# Altium PCB Copy of corePCB3.PcbDoc (part 2 of 3)
Units mil, origin at the board's own origin, x right, y up, seen from the top; angles counter-clockwise.
Board outline 6000 x 4000 mil, 6 copper layers (Top Layer, Layer 3, Layer 1, Layer 2, Layer 4, Bottom Layer), stack 32.111 mil thick; 90 components, 166 nets, 637 pads, 472 vias.
Unrouted connection lines stored in the file: 122.
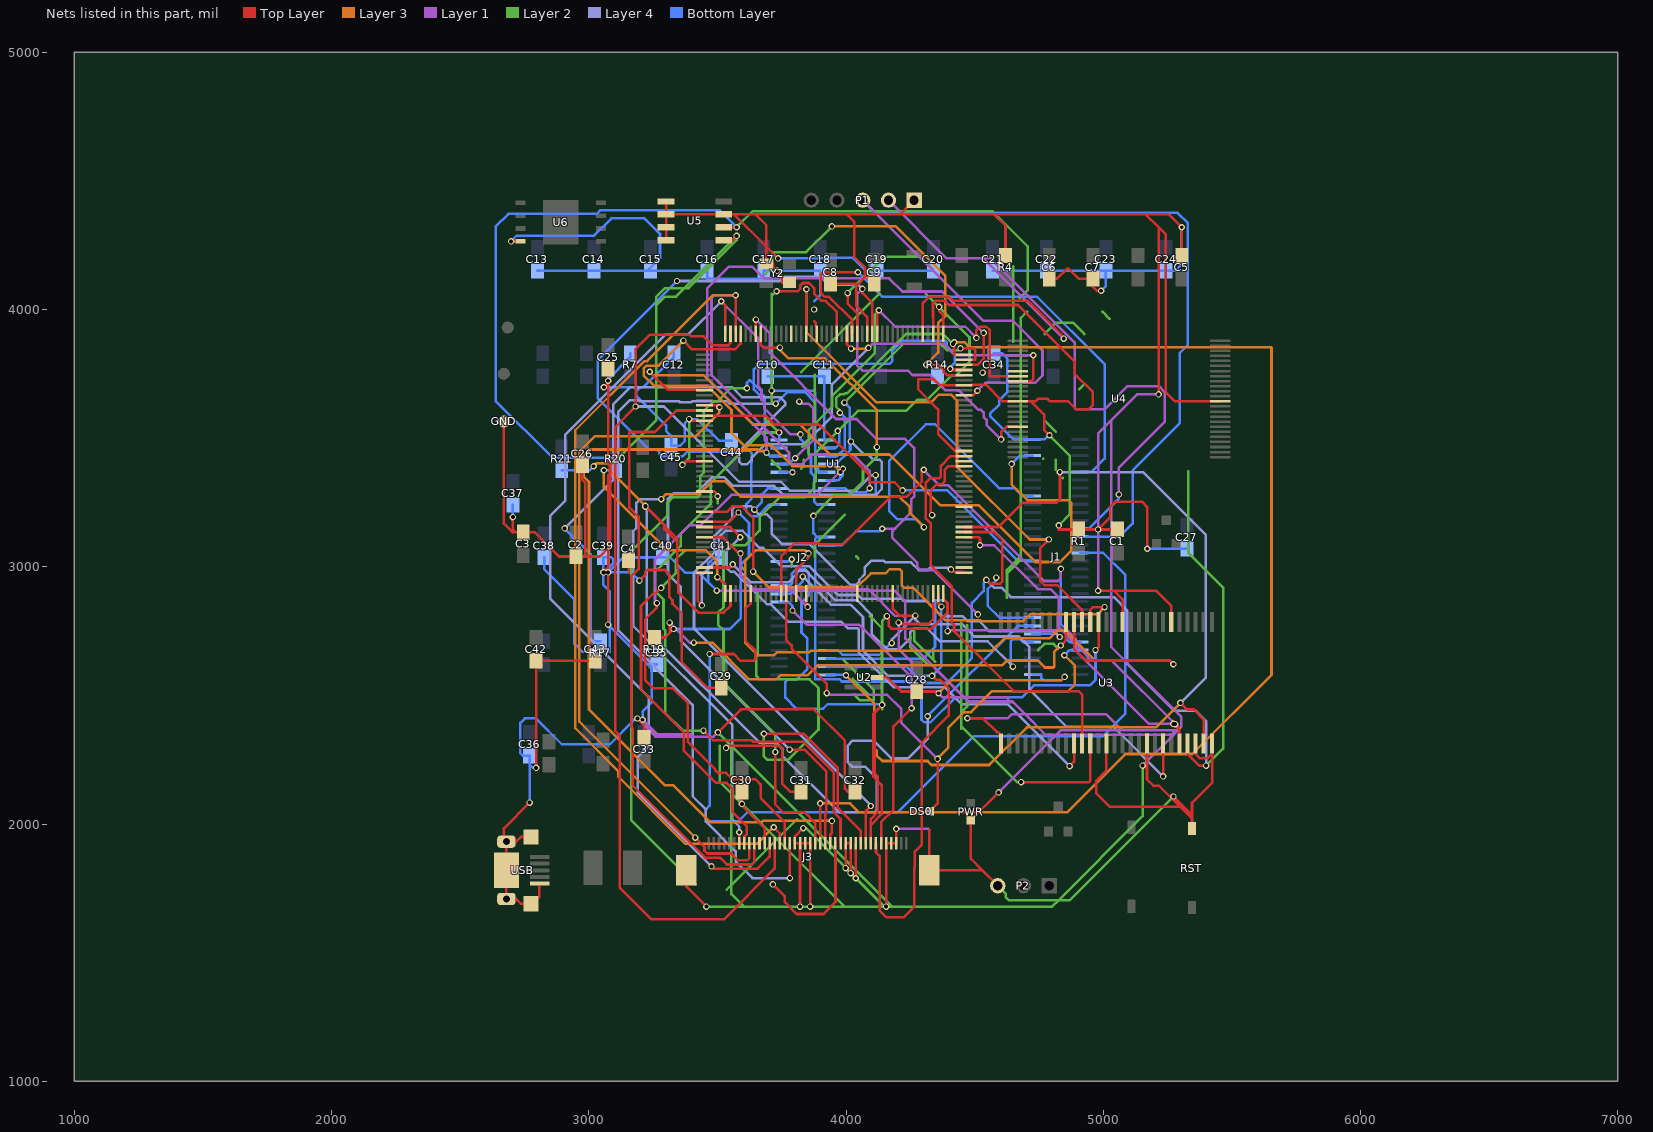
[diagram p6: the nets of this part, all layers, seen from the top]

## Via types
v1: diameter 25, hole 15, Top Layer to Bottom Layer, 472 vias

## Nets (pads, with @x,y where several pads share a name; then routed paths per layer and width w, separated by ;. In a path a pad name is that pad's centre, name@x,y a point inside that pad or via, vN(x,y) a via of type N, cw(c..) or ccw(c..) an arc to the next point about the centre after c; other vN are vias at no path point) (continued)
FMC_D12: J2.57 U1.78 U3.48 | length 2228.6
  Top Layer w10: U1.78@4180.93,2896.24 4180.93,2837.07 4208,2810 v1(4270,2810) ; v1(5232.99,2185) U3.48@5232.99,2312.56
  Layer 2 w10: 4266,2749.5 4266,2711 4338.38,2638.62 ; 4338.38,2677.12 4338.38,2638.62 ; 4346,2631 4338.38,2638.62
  Layer 4 w10: v1(4178,2703) 4178,2718 v1(4270,2810) 4270,2795 4288,2777 4450.62,2777 4498.62,2729 4672,2729 4713,2688 4713,2522 4857,2378 5039.99,2378 v1(5232.99,2185)
  Bottom Layer w10: J2.57@3925.04,2674.53 3970,2674.53 3986.53,2658 4130,2658 4175,2703 v1(4178,2703)
FMC_D13: J2.58 U1.96 U3.50 | length 3163.5
  Top Layer w10: U1.96@4459.09,3115.35 4516,3115.35 4521,3110.35 v1(4521,3083.61) ; v1(5273,2389) 5295.98,2366.02 ; v1(5279.98,2388.5) 5295.98,2372.5 5295.98,2366.02 ; U3.50@5295.98,2312.56 5295.98,2366.02
  Layer 1 w10: v1(4395,2750) 4399,2754 4839,2754 ; v1(4521,3083.61) 4575.5,3083.61 4746.37,2912.75 4795.25,2912.75 4828,2880 4828,2765 4839,2754 ; v1(5273,2389) 5178,2389 4893,2674 4893,2700 ; v1(5279.98,2388.5) 5032.98,2635.5 4952,2635.5 4941.03,2646.47 4941.03,2651.97 4893,2700 ; 4839,2754 4893,2700 ; 4839,2754 4859,2754 4893,2720 4893,2700
  Bottom Layer w10: J2.58@3925.04,2643.03 3961.47,2643.03 3962.5,2642 4300,2642 4346,2688 4346,2868 4347,2869 4384,2869 4395,2858 v1(4395,2750)
FMC_D14: J2.59 U1.97 U3.51 | length 5362.1
  Top Layer w10: U1.97@4459.09,3135.04 4576,3135.04 4608,3103.04 4608,2943 4599.5,2934.5 4560.5,2934.5 v1(4546,2949) ; U3.51@5327.48,2312.56 5327.48,2272 5372.48,2227 v1(5400,2227)
  Layer 2 w10: 4626,2879 4626,2974.56 ; 4704,3992 4680,3968 4680,3042 ; 4997,3992 5025,3964 ; 5331,3372 5331,3054 5466,2919 5466,2293 v1(5400,2227) ; 4626,2974.56 4626,2988 4680,3042 ; 4626,2974.56 4680,3028.56 4680,3042
  Layer 4 w10: v1(4546,2949) 4576,2919 4604,2919 4641,2882 5041.5,2882 5093,2830.5 5093,2624 5277,2440 5360,2440 5400,2400 v1(5400,2227)
  Bottom Layer w10: J2.59@3925.04,2611.54 4235.96,2611.54 4299.5,2548 4392.5,2548 4489,2644.5 4489,2859 4535,2905 4535,2938 v1(4546,2949)
FMC_D15: J2.60 U1.98 U3.53 | length 4148.1
  Top Layer w10: U1.98@4459.09,3154.72 4593.72,3154.72 4688,3249 4819,3249 4832,3262 4832,3367 v1(4831,3368) ; v1(5300,2471) 5326,2445 5352.47,2445 5390.47,2407 U3.53@5390.47,2312.56
  Layer 2 w10: 4772,3568 4815,3525 ; 4772,3904 4817,3949 4882,3949 4927,3904 ; 4815,3378 4815,3415.1 ; 4907.5,3690.5 4927,3710
  Layer 3 w10: v1(4000,2578) 4110,2468 4110,2294 4119,2285 4119,2267 4141,2245 4317,2245 4332.5,2229.5 4556.5,2229.5 4703,2376 5205,2376 v1(5300,2471)
  Layer 4 w10: v1(4831,3368) 5154,3368 5399,3123 5399,2570 v1(5300,2471)
  Bottom Layer w10: J2.60@3925.04,2580.04 3997.96,2580.04 v1(4000,2578)
FMC_NBL0: J2.43 U1.169 U3.15 | length 3349.1
  Top Layer w10: U1.169@3669.11,3905.33 3669.11,3862.89 3680,3852 v1(3743,3852) ; v1(4970,2676) 4982,2688 4982,2753.02 4981.02,2754 U3.15@4981.02,2785
  Layer 2 w10: v1(3873,3198) 3952.06,3277.06 4011.06,3277.06 4066,3332 4066,3375 4120,3429 v1(4120,3465)
  Layer 3 w10: v1(3743,3852) 3743,3843 3776,3810 3919,3810 4120,3609 v1(4120,3465)
  Bottom Layer w10: v1(3873,3198) 3873,3130.47 3888,3115.47 ; J2.43@3925.04,3115.47 3888,3115.47 ; v1(4970,2676) 4970,2560 4949,2539 4730,2539 4683.5,2492.5 4425,2492.5 4328,2395.5 4304,2395.5 4293.5,2406 4293.5,2505 4244.5,2554 3984,2554 3975,2563 3880,2563 3880,3107.47 3888,3115.47
FMC_NBL1: J2.44 U1.170 U3.39 | length 3616
  Top Layer w10: U1.170@3649.43,3905.33 v1(3649.43,3961) ; v1(4681,2163) 4944,2163 4949.53,2168.53 U3.39@4949.53,2312.56
  Layer 1 w10: v1(3649.43,3961) 3704,3906.43 3704,3832.44 3961.87,3574.57 4041.43,3574.57 4118.5,3497.5 4230,3497.5 4265,3462.5 4265,3272.5 4253.5,3261 4253.5,3210.5 4190.98,3147.98 ; v1(4140.98,3147.98) 4190.98,3147.98 ; v1(4513,2815) 4340.5,2987.5 4288,2987.5 4277.13,2998.37 4277.13,3014.87 4180,3112 4180,3137 4190.98,3147.98
  Layer 2 w10: 4448,2371 4448,2783 ; 4470.5,2772.5 4470.5,2456.5 4448.5,2434.5 4448.5,2379.5 4665,2163 v1(4681,2163)
  Bottom Layer w10: J2.44@3925.04,3083.98 3984,3083.98 4038.02,3138 4131,3138 v1(4140.98,3147.98)
FMC_NCE3: R17.2 U1.152 U4.9 | length 3824
  Top Layer w10: U1.152@4003.76,3905.33 4003.76,3864.24 v1(4020,3848) ; U4.9@4667.6,3721.53 4720,3721.53 4728,3729.53 v1(4728,3822)
  Layer 1 w10: v1(4087,3851) 4102.5,3866.5 4381,3866.5 4425.5,3822 v1(4728,3822)
  Layer 3 w10: v1(4020,3848) 4084,3848 v1(4087,3851)
  Layer 4 w10: v1(2906,3149) 3094.5,3337.5 3094.5,3630.5 3162,3698 3556,3698 3595,3659 3744,3659 3763.06,3639.94 3763.06,3628.08 3585.13,3450.15 3585.13,3408 3594.63,3398.5 3616,3398.5 3633.5,3416 3633.5,3422.5 3687.5,3476.5 3837.5,3476.5 3945,3584 3945,3709 v1(4087,3851)
  Bottom Layer w10: v1(2906,3149) 3008,3047 3008,2718 3016,2710 R17.2@3045.06,2710
FMC_NE1: J1.35 U1.151 | length 2030.1
  Top Layer w10: U1.151@4023.44,3905.33 4023.44,3960.49 3934.43,4049.5 3916.52,4049.5 3902.18,4063.84 3902.18,4136 3911.18,4145 v1(4046,4145)
  Bottom Layer w10: v1(4046,4145) 4141.5,4049.5 4743.5,4049.5 5005.25,3787.75 5005.25,3420.27 4954,3369.02 J1.35@4910,3369.02
FMC_NOE: J2.26 U1.146 U4.8 | length 1928.8
  Top Layer w10: U1.146@4121.87,3905.33 4121.87,3991 v1(4127.87,3997) ; v1(4507,3890) 4507,3920 4520,3933 4546,3933 4559,3920 4559,3741.22 U4.8@4667.6,3741.22
  Layer 1 w10: v1(4127.87,3997) 4191.87,3933 4464,3933 v1(4507,3890)
  Layer 2 w10: 3830,3466 3856,3492 ; 3856,3431.44 3856,3492 ; 3878,3747 3878,3554 ; v1(4127.87,3997) 4112.43,3981.56 4112.43,3830.5 3946.01,3664.08 3946.01,3622.01 3878,3554 ; 3856,3492 3856,3532 3878,3554 ; 3856,3492 3878,3514 3878,3554
  Bottom Layer w10: J2.26@3740,3367.44 v1(3792,3367.44)
FMC_NWAIT: J2.27 U1.150 U4.7 | length 1243.2
  Top Layer w10: v1(4006,4064) 4006,4023.13 4043.13,3986 U1.150@4043.13,3905.33 ; v1(4531,3755) v1@4536.9,3760.9
  Layer 1 w10: v1(3802,3422) 3873,3493 3873,3616 3856,3633 3827,3633 v1(3818,3642)
  Layer 2 w10: v1(4006,4064) 4147,4205 4290,4205 4335,4160 ; 4650,3874 4650,4168
  Bottom Layer w10: J2.27@3740,3398.94 3778.94,3398.94 v1(3802,3422)
FMC_NWE: J2.22 U1.147 U4.18 | length 3726.5
  Top Layer w10: v1(4064,4080) 4064,4064 4102.19,4025.81 U1.147@4102.19,3905.33 ; v1(4603,3495) 4603,3523.37 4624,3544.37 U4.18@4667.6,3544.37
  Layer 1 w10: v1(4064,4080) 4043.5,4059.5 4043.5,3783.09 4064,3762.59 4240.41,3762.59 4257.5,3745.5 4326.58,3745.5 4386.58,3685.5 4440.11,3685.5 4515.85,3609.75 4525.25,3609.75 4535,3600 4535,3582.5 4546.62,3570.88 4546.62,3551.38 v1(4603,3495)
  Layer 4 w10: v1(3343,4111) 3743,4111 3760,4128 3900,4128 3932,4096 4048,4096 v1(4064,4080)
  Bottom Layer w10: v1(3343,4111) 3035.5,3803.5 3035.5,3654.5 3234.18,3455.82 3264,3455.82 3274.5,3445.32 3274.5,3440 3285.5,3429 3365,3429 3384,3448 3591,3448 3594,3451 3624,3451 3634,3441 3634,3406.5 3631.5,3404 3631.5,3262.5 3613,3244 3613,3215 3632,3196 3655,3196 3700.46,3241.46 J2.22@3740,3241.46
FMC_SDCKE0: U1.35 U3.37 | length 2096
  Top Layer w10: U1.35@3450,3154.72 3549.28,3154.72 v1(3589,3115) ; v1(4869,2225) 4886.53,2242.53 U3.37@4886.53,2312.56
  Layer 4 w10: v1(3589,3115) 3536,3062 3536,2996 3552,2980 3566.37,2980 3691.95,2854.43 3707.12,2854.43 3774.55,2787 3980.5,2787 4007,2760.5 4046,2760.5 4049.27,2757.23 4049.27,2667.73 4185,2532 4383,2532 4449,2466 4628,2466 v1(4869,2225)
FMC_SDCLK: U1.112 U3.38 | length 1629.9
  Top Layer w10: U1.112@4459.09,3430.32 4406.86,3430.32 4368.54,3392 4368.54,3350.17 4362.37,3344 4326.51,3344 4310.51,3328 4310.51,3186.99 4320,3177.5 4320.28,3177.5 4329.78,3168 4329.78,3005.72 4410.5,2925 4410.5,2782.67 4419.87,2773.3 4419.87,2749.8 4653.67,2516 4905,2516 4918.03,2502.97 U3.38@4918.03,2312.56
FMC_SDNCAS: U1.160 U3.17 | length 2224.6
  Top Layer w10: U1.160@3846.28,3905.33 v1(3846.28,4079) ; v1(4789,3106) 4755.5,3072.5 4755.5,2944 4770.75,2928.75 4821.25,2928.75 4918.03,2831.97 U3.17@4918.03,2785
  Layer 3 w10: v1(3846.28,4079) 3846.28,3911.72 4118.78,3639.22 4330.22,3639.22 4360.5,3669.5 4407.5,3669.5 4431.61,3645.39 4431.61,3388.69 4714.31,3106 v1(4789,3106)
FMC_SDNE0: R19.2 U1.34 U3.19 | length 2936.8
  Top Layer w10: R19.2@3255.06,2725 3296,2725 ; v1(3314,2783) 3314,2743 3296,2725 ; v1(3330,2758) 3297,2725 3296,2725 ; U1.34@3450,3174.41 3545.41,3174.41 v1(3582,3211) ; v1(4835.08,2694) 4855.04,2713.96 U3.19@4855.04,2785
  Layer 1 w10: v1(3314,2783) 3392,2705 v1(3408,2705)
  Layer 2 w10: 4747,2675.94 4771.03,2699.97 4807.04,2699.97 4822.66,2684.35 4822.66,2682.04
  Layer 3 w10: v1(3408,2705) 3480.19,2705 3622.69,2562.5 3730.5,2562.5 3746.5,2578.5 3851.5,2578.5 3890.5,2617.5 4607.5,2617.5 4625.5,2635.5 4745.9,2635.5 4772.9,2608.5 4806.5,2608.5 4809,2611 4809,2667.92 v1(4835.08,2694)
  Bottom Layer w10: v1(3330,2758) 3548.5,2758 3591,2800.5 3591,3008 3623,3040 3623,3170 v1(3582,3211)
FMC_SDNRAS: U1.59 U3.18 | length 3356.9
  Top Layer w10: U1.59@3806.91,2896.24 3806.91,2988.91 3854,3036 v1(3854,3052) ; U3.18@4886.53,2785 4886.53,2680.47 4931.5,2635.5 5258.5,2635.5 v1(5273,2621)
  Layer 2 w10: 3991,2638 4108.5,2520.5 4108.5,2482 4107.5,2481 4055,2481 4032,2504 ; 4040,3040 4048,3032
  Layer 3 w10: v1(3854,3052) 3841,3065 3650,3065 3609,3024 3609,2704 3656.5,2656.5 3720.5,2656.5 3731.5,2667.5 3857,2667.5 3863.5,2674 4568,2674 4616,2722 4791,2722 4819.5,2750.5 4853,2750.5 4968,2635.5 5258.5,2635.5 v1(5273,2621)
FMC_SDNWE: U1.32 U3.16 | length 2090.6
  Top Layer w10: U1.32@3450,3213.78 3537.78,3213.78 3558.5,3234.5 3595,3234.5 3639,3190.5 v1(3639,2981) ; U3.16@4949.53,2785 4949.53,2832.53 4960,2843 v1(5005,2843)
  Layer 3 w10: v1(3639,2981) 3699,2921 4043,2921 4096.5,2974.5 4153.91,2974.5 4170.03,2990.62 4208,2990.62 4217.03,2981.59 4217.03,2927.05 4225.43,2918.65 4260.21,2918.65 4387.36,2791.5 4522.5,2791.5 4525.52,2788.48 4688.88,2788.48 4715.52,2815.12 4977.12,2815.12 v1(5005,2843)
GBC_KEY: J1.15 U1.13 | length 1522.9
  Top Layer w10: U1.13@3450,3587.8 3687.5,3587.8 3722.3,3553 3895.06,3553 4091.5,3356.56 4091.5,3333 4096,3328.5 4188.5,3328.5 v1(4220,3297)
  Bottom Layer w10: v1(4220,3297) 4394,3297 4668.44,3022.56 J1.15@4724.96,3022.56
GBC_LED: J1.45 U1.50 | length 3677.3
  Top Layer w10: v1(3469.5,2661) 3564,2661 3590.56,2634.44 3640.51,2634.44 3648,2641.93 3648,2673.93 3609.93,2712 3609.93,2837.17 3629.74,2856.99 U1.50@3629.74,2896.24
  Bottom Layer w10: v1(3469.5,2661) 3469.5,2071.22 3455.05,2056.77 3455.05,2018.72 3464,2009.77 3580.84,2009.77 3616.06,2045 4201,2045 4496.5,2340.5 4639.13,2340.5 4639.63,2341 4998.07,2341 5085,2427.93 5085,2969.06 5000,3054.06 J1.45@4910,3054.06
GND: C1.2 C2.1 C3.2 C4.1 C5.2 C6.1 C7.1 C8.1 C9.1 C10.1 C11.1 C12.2 C13.1 C14.1 C15.1 C16.1 C17.1 C18.1 C19.1 C20.1 C21.1 C22.1 C23.1 C24.1 C25.1 C26.1 C27.1 C28.1 C29.1 C30.1 C31.1 C32.1 C33.2 C34.2 C35.1 C36.1 C37.1 C38.1 C39.1 C40.1 C41.1 C42.1 C43.1 C44.2 C45.2 GND.1 J1.1 J1.30 J2.31 J3.3 J3.4 J3.5 J3.11 J3.12 J3.13 J3.20 J3.21 J3.22 J3.23 J3.29 J3.A J3.B P1.1 P2.3 PWR.2 R1.2 R4.2 R7.2 R14.1 RST.2 U1.14 U1.22 U1.37 U1.61 U1.71 U1.90 U1.102 U1.113 U1.126 U1.135 U1.148 U1.158 U2.2 U3.6 U3.12 U3.28 U3.41 U3.46 U3.52 U3.54 U4.13 U4.36 U5.1 U5.2 U5.3 U5.4 U5.7 U6.4 USB.5 USB.6 USB.7 USB.8 USB.9 Y2.2 Y2.4 | length 45869.3
  Top Layer w10: GND.1@2670,3565 2670,3168 2703,3135 2714,3135 ; USB.7@2679.65,1708.78 USB.7@2680,1708.78 ; v1(2698,4265) U6.4@2735,4265 ; v1(2705,3193) 2705,3144 2714,3135 ; v1(2770.06,2083.06) 2670,1983 2670,1931.22 USB.6@2679.65,1931.22 USB.6@2680,1931.22 ; USB.9@2775,1950 2735.78,1950 2717,1931.22 USB.6@2680,1931.22 ; v1(2795.06,2218) C42.1@2795.06,2635 C43.1@3025.06,2635 ; USB.5@2809,1768.82 2807,1768.82 2807,1716 2775,1716 USB.8@2775,1690 2735.78,1690 2717,1708.78 USB.7@2680,1708.78 ; C26.1@2975.06,3395 2975.06,3337.94 2987,3326 2987,3048 2979,3040 ; v1(3056.38,2978) 3075,2996.62 ; v1(3059,2978) 3075,2994 ; v1(3059,3698) v1@3075,3714 ; v1(3075,2775) v1(3075,2978) 3075,2994 ; C25.1@3075,3770 v1(3075,3723) v1@3075,3714 ; 3155.06,2978.06 C4.1@3155.06,3025 ; v1(3189,2410) 3215,2384 C33.2@3215,2335 ; v1(3197,2946) 3218.84,2967.84 3218.84,2977 3229.34,2987.5 3296,2987.5 3313,2970.5 3313,2882.02 3325.42,2869.59 3325.42,2856.37 3361.5,2820.29 3361.5,2629.13 3460.63,2530 C29.1@3515,2530 ; U5.4@3300.59,4270 U5.3@3300.59,4320 U5.2@3300.59,4370 ; U5.1@3300.59,4420 U5.2@3300.59,4370 ; v1(3364,3396) 3378.63,3410.63 U1.22@3450,3410.63 ; J3.B@3379.35,1820.57 3379.35,1757 v1(3457.35,1679) ; v1(3390,3574) 3395.89,3568.11 U1.14@3450,3568.11 ; U1.37@3450,3115.35 3520.14,3115.35 3583.49,3052 v1(3590,3052) ; v1(3502,2356) 3591.5,2445.5 3874.57,2445.5 3995.57,2324.5 3995.57,2137.43 4008,2125 C32.1@4035.06,2125 ; v1(3534,2296) 3541.5,2303.5 3744,2303.5 3752,2295.5 3752,2157.79 3784.79,2125 C31.1@3825.06,2125 ; C30.1@3595.06,2125 v1(3595.06,2078.06) 3595.06,2072.4 3683.46,1984 J3.29@3683.46,1925 ; v1(3736,4199) 3690,4245 ; Y2.2@3780.55,4105 3752,4105 3752,4131 v1(3733,4150) 3717.17,4165.83 3717.17,4177.83 Y2.4@3690,4177.83 3690,4245 ; v1(3821.26,1679) J3.22@3821.26,1925 ; v1(3833.57,1984) 3801.57,1952 J3.23@3801.57,1925 J3.22@3821.26,1925 ; U1.61@3846.28,2896.24 3846.28,2848.72 v1(3851,2844) ; v1(3860.63,1679) J3.20@3860.63,1925 J3.21@3840.94,1925 J3.22@3821.26,1925 ; 3876,3955 3882,3949 3882,3936.65 3885.65,3933 U1.158@3885.65,3905.33 ; C8.1@3940.06,4100 4047.74,4100 ; v1(3998.43,1828.57) J3.13@3998.43,1925 J3.12@4018.11,1925 v1(4018.11,1808.89) ; v1(4037.8,1789.2) J3.11@4037.8,1925 ; U1.148@4082.5,3905.33 4082.5,3970.86 4040,4013.36 4040,4092.26 4047.74,4100 ; C9.1@4110.06,4100 4110.06,4103.5 4074,4139.56 ; U2.2@4120,2570 4160,2570 4215,2515 C28.1@4275,2515 4353,2515 v1(4359.5,2508.5) ; v1(4155.91,1679) J3.5@4155.91,1925 J3.4@4175.59,1925 J3.3@4195.28,1925 v1(4195.28,1981.23) ; P1.1@4265,4425 4210,4370 ; J3.A@4323.23,1820.57 J3.A@4323.23,1821 ; 4323.23,1977 J3.A@4323.23,1821 ; U1.135@4338.41,3905.33 4338.41,3970.5 4338.28,3970.63 4338.28,4024 4347.78,4033.5 4385.28,4033.5 4401.28,4017.5 4668.48,4017.5 4888.87,3797.11 4888.87,3750.13 4960,3679 4960,3629 4944,3613 4893.86,3613 4864.06,3642.79 4793.5,3642.79 4783.79,3652.5 4746.5,3652.5 4736.79,3642.79 4720,3642.79 ; U1.113@4459.09,3450 4424,3450 4358.5,3515.5 4358.5,3612.04 4280.5,3690.04 4280.5,3728 4281.31,3728.81 4340.06,3728.81 4362.97,3705.91 U1.126@4459.09,3705.91 4487,3705.91 4487,3708 4544,3708 4609.21,3642.79 U4.13@4667.6,3642.79 4720,3642.79 ; v1(4472,2411) 4533.13,2411 4587.04,2357.1 4591.13,2357.1 4603.07,2345.16 U3.28@4603.07,2312.56 ; P2.3@4590,1760 4529,1821 ; v1(4593,2123) PWR.2@4485,2015 4485,1865 4529,1821 ; R4.2@4620.06,4210 4620.06,4325.94 4576,4370 ; C6.1@4790.06,4120 4821,4120 4859,4158 4866,4158 4904,4120 C7.1@4960.06,4120 4960.06,4088 4975.06,4073 v1(4992,4073) ; v1(4791,3511) 4770,3532 4770,3592.79 4720,3642.79 ; v1(4827,3161) 4827,3145 R1.2@4905.06,3145 v1(4980,3145) ; v1(4980,2907) 5041.45,2907 ; U3.41@5012.52,2312.56 5012.52,2207.52 4972.5,2167.5 4972.5,2120.5 5026.5,2066.5 5299.5,2066.5 ; C1.2@5055.06,3145 v1(4980,3145) ; U3.12@5075.51,2785 5075.51,2872.94 5041.45,2907 ; U3.46@5170,2312.56 5170,2173.69 5194.96,2148.73 5217.27,2148.73 5299.5,2066.5 ; v1(5171,3070) 5171,3233 5152,3252 5046.63,3252 5026.63,3232 5026.63,3191.63 v1(4980,3145) ; v1(5215,3670) 5215,4320 ; U3.6@5264.49,2785 5264.49,2848 5205.49,2907 5041.45,2907 ; v1(5273,2107) 5313.5,2066.5 ; v1(5305,4320) 5305.06,4320 C5.2@5305.06,4210 ; v1(5305,4320) 5255.06,4370 5165,4370 ; RST.2@5345,1982.09 5345,2021 ; U3.52@5358.98,2312.56 5358.98,2272 5374.98,2256 5405.97,2256 5422.47,2272.5 ; U3.54@5421.97,2312.56 5421.97,2273 5422.47,2272.5 ; U4.36@5455,3642.79 5279.41,3642.79 5242.21,3680 5242.21,4292.79 5215,4320 ; USB.7@2680,1708.78 USB.9@2680,1820 USB.6@2680,1931.22 ; 2714,3135 C3.2@2745.06,3135 2789,3135 2884,3040 C2.1@2950.06,3040 2979,3040 ; 2979,3040 3043,3040 3075,3072 ; 3075,2994 3075,2996.62 ; 3075,2996.62 3075,3072 ; 3075,3072 3082.65,3079.65 3082.65,3354.78 ; 3075,3072 3075,3347.13 ; 3075,3347.13 3075,3354.78 3082.65,3362.43 ; 3075,3347.13 3082.65,3354.78 ; 3075,3401.78 3075,3400.65 3082.65,3393 ; 3075,3401.78 3075,3409.43 ; 3075,3401.78 3082.65,3394.13 ; 3075,3409.43 3075,3698 v1@3075,3714 ; 3075,3409.43 3082.65,3401.78 3082.65,3394.13 ; 3082.65,3354.78 3082.65,3362.43 ; 3082.65,3362.43 3082.65,3393 ; 3082.65,3393 3082.65,3394.13 ; U5.2@3300.59,4370 U5.7@3525,4370 3565,4370 ; 3565,4370 3690,4245 ; 3565,4370 3648,4370 ; 3648,4370 4004,4370 ; 3648,4370 3690,4328 3690,4245 ; 4004,4370 4210,4370 ; 4004,4370 4032,4342 4032,4205 4074,4163 4074,4139.56 ; 4047.74,4100 4074,4126.26 4074,4139.56 ; 4210,4370 4576,4370 ; J3.A@4323.23,1821 4529,1821 ; 4576,4370 5165,4370 ; 5165,4370 5215,4320 ; 5299.5,2066.5 5306.5,2059.5 ; 5299.5,2066.5 5313.5,2066.5 ; 5306.5,2059.5 5345,2021 ; 5306.5,2059.5 5313.5,2066.5 ; 5313.5,2066.5 5345,2035 ; 5345,2021 5345,2035 ; 5345,2035 5345,2082 5424,2161 5424,2270.97 5422.47,2272.5
  Layer 1 w10: v1(3189,2410) 3259.5,2339.5 3275.5,2339.5 ; v1(3497.5,2907.5) 3787.5,2907.5 ; v1(3502,2356) 3485.5,2339.5 3406.5,2339.5 ; v1(3590,3052) 3590,2965 3642,2913 4087.46,2913 4092.96,2907.5 ; v1(3851,2844) 3787.5,2907.5 ; v1(4195.28,1981.23) 4319,1981.23 4323.23,1977 ; v1(4359.5,2508.5) 4375.5,2492.5 4458.42,2492.5 ; v1(4472,2411) 4628.57,2411 4644.57,2427 4696,2427 ; v1(4593,2123) 4816.5,2346.5 ; v1(4980,2907) v1(4980,3145) 4980,3518 5031,3569 ; v1(5153,2227) 5272.5,2346.5 ; v1(5215,3670) 5132,3670 5031,3569 ; 3267,2348 3398,2348 3406.5,2339.5 ; 3267,2348 3261.5,2348 3209.5,2400 v1(3209.5,2405.5) 3267,2348 ; 3267,2348 3275.5,2339.5 ; 3275.5,2339.5 3406.5,2339.5 ; 3787.5,2907.5 4092.96,2907.5 ; 4092.96,2907.5 4190.96,2809.5 4221,2809.5 4230.5,2800 ; 4092.96,2907.5 4188.68,2907.5 4230.5,2865.68 4230.5,2800 ; 4230.5,2721.99 4230.5,2720.42 4458.42,2492.5 ; 4230.5,2721.99 4459.99,2492.5 ; 4230.5,2721.99 4230.5,2800 ; 4458.42,2492.5 4477.42,2473.5 4630.5,2473.5 ; 4458.42,2492.5 4459.99,2492.5 ; 4459.99,2492.5 4475.8,2476.7 4630.5,2476.7 ; 4459.99,2492.5 4630.5,2492.5 4630.5,2476.7 ; 4630.5,2473.5 4630.5,2476.7 ; 4630.5,2473.5 4649.5,2473.5 ; 4630.5,2476.7 4646.3,2476.7 4649.5,2473.5 ; 4649.5,2473.5 4696,2427 ; 4696,2427 5011.15,2427 5073.15,2365 ; 4696,2427 4776.5,2346.5 4816.5,2346.5 ; 4816.5,2346.5 5272.5,2346.5 ; 4816.5,2346.5 4835,2365 5073.15,2365 ; 5031,3569 5031,2689 5304,2416 5304,2378 5291,2365 ; 5073.15,2365 5272.5,2365 ; 5272.5,2346.5 5291,2365 ; 5272.5,2346.5 5272.5,2365 ; 5272.5,2365 5291,2365
  Layer 2 w10: v1(3364,3396) 3390,3422 v1(3390,3574) ; v1(3457.35,1679) 3603,1679 ; v1(3502,2356) 3510,2348 3554,2304 ; 3510,2304 3510,2163 3554,2119 ; 3536,1744.35 3554,1762.35 ; v1@3595,2078 3554,2119 ; v1(3595.06,2078.06) 3732.39,1940.74 ; 3810.14,2018.49 3732.39,1940.74 ; v1(3833.57,1984) 3844.63,1984 v1@4149.63,1679 ; v1(3998.43,1828.57) v1(4018.11,1808.89) v1(4037.8,1789.2) v1@4148,1679 ; P2.3@4590,1760 4620.61,1729.39 4620.61,1716.34 4633.47,1703.47 4825.47,1703.47 ; v1(4791,3511) 4870.5,3431.5 4870.5,3204.5 v1(4827,3161) ; 4843,3344 4843,3346 ; v1(5153,2227) 5153,2210 5153,2031 4825.47,1703.47 ; v1(5273,2107) 4869.47,1703.47 4825.47,1703.47 ; 3554,1762.35 3732.39,1940.74 ; 3554,1762.35 3554,2119 ; 3554,1762.35 3554,1728 3603,1679 ; 3554,2119 3554,2304 ; 3554,2304 4167.45,1690.55 4179,1679 ; 3603,1679 v1(3821.26,1679) v1(3860.63,1679) 3994.13,1679 ; 3732.39,1940.74 3994.13,1679 ; 3994.13,1679 v1@4148,1679 ; v1@4148,1679 v1@4149.63,1679 ; v1@4149.63,1679 4151,1679 v1(4155.91,1679) 4179,1679 ; 4179,1679 4801,1679 4825.47,1703.47
  Layer 3 w10: v1(4359.5,2508.5) 4409.9,2558.9 4836.9,2558.9 v1(4850,2572)
  Bottom Layer w10: v1(2698,4265) 2720,4287 3020.59,4287 3088.09,4354.5 3216.5,4354.5 3277,4294 3277,4200 3233.53,4156.53 C15.1@3227,4150 ; v1(2705,3193) C37.1@2705,3240 ; v1(2770.06,2083.06) 2770.06,2231.94 ; v1(2795.06,2218) 2784,2218 2770.06,2231.94 ; C13.1@2800.06,4150 2803.03,4152.97 2806,4150 C14.1@3020.06,4150 C15.1@3227,4150 ; C38.1@2826.38,3036.93 2826.38,2990.62 2944,2873 2944,2701 2976,2669 3082,2669 v1@3082,2768 ; v1(3059,2978) 3096.07,3015.07 3096.07,3028.86 3088,3036.93 C39.1@3059,3036.93 ; v1(3059,3698) 3213.5,3698 ; v1(3075,2775) v1@3082,2768 ; v1(3075,3723) 3075,3728.52 3161.07,3814.59 R7.2@3161.07,3830.59 ; 3155.06,2978.06 3155,2978 ; v1(3197,2946) 3165,2978 3155,2978 ; C35.1@3265.06,2620 C35.1@3245.5,2620 ; C12.2@3331.07,3830.59 3331.07,3815.57 3213.5,3698 ; v1(3497.5,2907.5) 3464,2941 ; C41.1@3516.38,3036.93 3488,3036.93 3464,3012.93 3464,2941 ; C44.2@3555.06,3490 3505.56,3490 3421.56,3574 v1(3390,3574) 3373,3557 3373,3488 3355,3470 C45.2@3320.06,3470 3320.06,3508.93 3301,3527.99 3301,3549.5 3184,3666.5 3184,3681.5 3200,3697.5 3213,3697.5 3213.5,3698 ; C10.1@3696.07,3740.59 3696.07,3740 C11.1@3916.07,3740 ; v1(3736,4199) 3936,4199 3938,4201 4027,4201 4078,4150 C19.1@4120.06,4150 C20.1@4340.06,4150 ; 3876,4032 3900.06,4056.06 C18.1@3900.06,4150 v1(3733,4150) C17.1@3680.06,4150 3680.06,4119.5 3460.06,4119.5 C16.1@3460.06,4150 C15.1@3240.06,4150 C15.1@3227,4150 ; C11.1@3916.07,3740.59 C11.1@3916.07,3740 ; J2.31@3925.04,3493.43 3916.07,3493.43 C11.1@3916.07,3740 ; C21.1@4570.06,4150 C22.1@4780.06,4150 C23.1@5010.06,4150 ; C34.2@4575.06,3830 4608,3830 4627.5,3810.5 4627.5,3679.5 4596.5,3648.5 4596.5,3631.5 4560,3595 4560,3585.94 4650.94,3495 J1.30@4724.96,3495 4772,3495 4788,3511 v1(4791,3511) ; J1.1@4724.96,2581.61 4759.5,2581.61 4759.5,2567.4 4768,2558.9 4836.9,2558.9 v1(4850,2572) ; v1(4992,4073) 5010.06,4091.06 C23.1@5010.06,4150 ; v1(5171,3070) C27.1@5324.94,3070 ; v1(5305,4320) 5305,4175 5280,4150 C24.1@5245.06,4150 C23.1@5010.06,4150 ; 2770.06,2231.94 C36.1@2770.06,2265 2744,2265 2734,2275 2734,2393 2752,2411 2794,2411 2895,2310 3082,2310 3177.5,2405.5 v1(3209.5,2405.5) 3209.5,2437.5 3245.5,2473.5 C35.1@3245.5,2620 ; C39.1@3056.38,3036 C39.1@3056.38,3036.93 C39.1@3059,3036.93 ; C39.1@3056.38,3036 3059,3036 C39.1@3059,3036.93 ; C39.1@3056.38,3036 v1(3056.38,2978) 3056.38,2930 3082,2904.38 v1@3082,2768 ; v1@3082,2768 3230,2620 C35.1@3245.5,2620 ; 3133,3036 3133.93,3036.93 3232.93,3036.93 ; 3133,3036 v1(3075,2978) 3155,2978 ; 3133,3036 3232,3036 3232.93,3036.93 ; 3232.93,3036.93 C40.1@3286.38,3036.93 3315.14,3036.93 3376,2976.07 3428.93,2976.07 3464,2941
  other v1: 3876,4000
IIC_SCL: J1.8 R20.1 U1.45 U5.6 | length 4869.9
  Top Layer w10: v1(3500,2960) 3518,2942 3520,2942 3531.32,2930.68 U1.45@3531.32,2896.24 ; U5.6@3525,4320 v1(3575,4320)
  Layer 2 w10: v1(3575,4320) 3637,4382 4570,4382 4706,4246 4706,4075 4675,4044
  Layer 3 w10: v1(3059,3375) 3059,3310 3304,3065 3453,3065 3500,3018 v1(3500,2960)
  Bottom Layer w10: v1(3059,3375) R20.1@3105.06,3375 3105.06,3408 3089.06,3424 2859,3424 2638,3645 2638,4322 2688,4372 3031,4372 3045.5,4386.5 3508.5,4386.5 v1(3575,4320) ; v1(4584,2958) 4584,2946.97 4551,2913.97 4551,2848 4596.91,2802.09 J1.8@4724.96,2802.09
IIC_SDA: J1.7 R21.1 U1.46 U5.5 | length 6354
  Top Layer w10: v1(3220,3234) 3294.54,3159.46 ; v1(3220,3237) 3294.54,3162.46 3294.54,3159.46 ; U5.5@3525,4270 3559,4270 v1(3575,4286) ; U1.46@3551,2896.24 3551,2848 ; 3294.54,3159.46 3344,3110 3344,3096.54 ; 3294.54,3159.46 3294.54,3146 3344,3096.54 ; 3344,3096.54 3344.5,3096.04 3344.5,2997 3348.15,2993.35 3348.15,2900.1 3426.75,2821.5 ; 3344,3096.54 3344,2995 3348,2991 3348,2900 3426.5,2821.5 3426.75,2821.5 ; 3426.75,2821.5 3524.5,2821.5 ; 3524.5,2821.5 3551,2848 ; 3524.5,2821.5 3551,2848
  Layer 2 w10: v1(3019,3391) 3029.78,3401.78 3094.29,3401.78 3263,3570.49 3263,3587 3263,4017 ; 3575,4270 3388,4083 3372,4083 ; v1(3575,4286) 3372,4083 ; 3263,4017 3263,4050 3296,4083 3372,4083 ; 3263,4017 3296,4050 3339,4050 3372,4083
  Layer 3 w10: v1(3019,3391) 3029.78,3401.78 3074.93,3401.78 3084.71,3392 3084.71,3372.29 v1(3220,3237)
  Layer 4 w10: v1(3220,3234) 3226,3228 3226,2753 3663,2316 3728,2316 3753,2291 3753,2265 3972,2046 4112,2046 4120,2054 4120,2176 4073,2223 4023,2223 4006,2240 4006,2304 4026,2324 4107,2324 4176.5,2254.5 4240.5,2254.5 4317,2331 v1(4317,2419)
  Bottom Layer w10: R21.1@2895.06,3375 3003,3375 v1(3019,3391) ; v1(4317,2419) 4668.59,2770.59 J1.7@4724.96,2770.59
JTCK: J1.42 P1.2 U1.137 | length 3483.8
  Top Layer w10: U1.137@4299.04,3905.33 4299.04,4026.26 4322.28,4049.5 4401.28,4049.5 4417.28,4033.5 4707,4033.5 4846.25,3894.25 v1(4846.25,3886.75)
  Layer 1 w10: P1.2@4165,4425 4391,4199 4534,4199 ; v1(4846.25,3886.75) 4534,4199 ; v1(5061,3281) 5061,3385 5239,3563 5239,3680 5217,3702 5095,3702 5006,3613 4894.83,3613 4888.5,3619.33 4888.5,3872.5 4562,4199 4534,4199
  Bottom Layer w10: J1.42@4910,3148.54 4944.54,3148.54 5061,3265 v1(5061,3281)
JTMS: J1.43 P1.3 U1.124 | length 4157.9
  Top Layer w10: U1.124@4459.09,3666.54 4493.04,3666.54 v1(4511,3684.5)
  Layer 1 w10: P1.3@4065,4425 4533.22,3956.78 4648.22,3956.78 4764,3841 4764,3744 4734.84,3714.84 4541.34,3714.84 v1(4511,3684.5)
  Bottom Layer w10: P1.3@4065,4425 4114.5,4375.5 5289.5,4375.5 5329,4336 5329,3863 5298,3832 5298,3558.66 5114,3374.66 5114,3168 5063.05,3117.05 J1.43@4910,3117.05
KEY0: J1.6 U1.44 | length 2070
  Top Layer w10: v1(3440,2850) 3424,2866 3424,2977.56 U1.44@3450,2977.56
  Layer 4 w10: v1(3440,2850) 3440,2968 3504.8,3032.8 3504.8,3113.8 3531,3140 3597.67,3140 3664,3073.67 3677.33,3073.67 3749.5,3001.5 3858.18,3001.5 3969.45,2890.23 4046.27,2890.23 4061.5,2875 4218,2875 4226,2867 4313,2867 4372,2808 4453,2808 4472,2789 4518,2789 4558,2749 4809,2749 v1(4831,2727)
  Bottom Layer w10: J1.6@4724.96,2739.09 4818.91,2739.09 v1(4831,2727)
KEY1: J1.5 U1.43 | length 1726.5
  Top Layer w10: U1.43@3450,2997.24 3548.24,2997.24 v1(3560,3009)
  Layer 4 w10: v1(3560,3009) 3630,2939 3776,2939 3808.5,2971.5 3808.5,2976 3818,2985.5 3842.5,2985.5 3959,2869 4044,2869 4100,2813 4100,2739.5 4160,2679.5 4208,2679.5 4249,2720.5 4249,2744 4264,2759 4316,2759 4365,2710 4551,2710 v1(4649,2612)
  Bottom Layer w10: v1(4649,2612) 4640,2621 4640,2710 4648,2718 4677.6,2718 4688,2707.6 J1.5@4724.96,2707.6
KEY2: J1.28 U1.8 | length 2827.1
  Top Layer w10: v1(3237,3758) 3307.62,3687.38 3423.18,3687.38 3423.18,3686.22 U1.8@3450,3686.22
  Layer 3 w10: v1(3237,3758) 3250.5,3744.5 3446.5,3744.5 3638,3553 3822,3553 3938.5,3436.5 4168.94,3436.5 4365.94,3239.5 4515.5,3239.5 4736.5,3018.5 4832,3018.5 4875,3061.5 4875,3248 4864,3259 4705,3259 4644,3320 v1(4644,3400)
  Bottom Layer w10: v1(4644,3400) 4676.01,3432.01 J1.28@4724.96,3432.01
LCD_B3: J2.35 J3.24 U1.154 | length 4537.2
  Top Layer w10: v1(3730,4071) 3813,4071 3822,4080 3822,4093 3832,4103 3856,4103 3876,4083 3876,4061.5 3904,4033.5 3921,4033.5 3964.39,3990.11 U1.154@3964.39,3905.33 ; v1(3781.89,1789.5) J3.24@3781.89,1925
  Layer 2 w10: 3711,3637 v1(3711,3685) 3711,3968 3711,4052 ; 3711,4062 3711,4052 ; v1(3730,4071) 3711,4052
  Layer 4 w10: v1(3727,3634) 3547.5,3634 3538,3643.5 3402.5,3643.5 3398.22,3639.22 3355.5,3639.22 3351.22,3643.5 3196,3643.5 3193,3646.5 3158.5,3646.5 3115,3603 3115,2752 3403.71,2463.29 3403.71,2107.93 3454.96,2056.68 3454.96,2009.68 3571.05,1893.59 3571.05,1854.12 3635.67,1789.5 v1(3781.89,1789.5)
  Bottom Layer w10: v1(3711,3685) 3874,3685 3880,3679 3880,3639 ; v1(3727,3634) 3772,3679 3840,3679 3880,3639 ; J2.35@3925.04,3367.44 J2.35@3892.5,3367.44 ; 3880,3381.98 3880,3639 ; 3880,3381.98 3880,3379.44 3892,3367.44 J2.35@3892.5,3367.44 ; 3880,3381.98 3892.5,3381.98 J2.35@3892.5,3367.44
LCD_B4: J2.36 J3.25 U1.173 | length 3959.8
  Top Layer w10: v1(3265,2859) 3265,2842 3219,2796 3219,2560 3252,2527 3328,2527 3385,2470 3385,2319 3492.5,2211.5 3492.5,2208 3501.5,2199 3534,2199 3559,2174 3648,2174 3668,2154 3668,2100.2 3762.2,2006 J3.25@3762.2,1925 ; v1(3368,3879) 3402,3845 3568,3845 3590.37,3867.37 U1.173@3590.37,3905.33
  Layer 1 w10: v1(3265,2859) 3257.5,2866.5 3257.5,3028.5 3391,3162 3436.5,3162 3554,3279.5 3886.5,3279.5 v1(3988,3381)
  Layer 3 w10: v1(3368,3879) 3271,3782 3224,3782 3213,3771 3213,3744 3253,3704 3460,3704 3555,3609 3555,3520 3603.18,3471.82 3710.68,3471.82 3791.5,3391 3955,3391 v1(3978,3368)
  Bottom Layer w10: J2.36@3925.04,3335.94 3968,3335.94 ; v1(3978,3368) 3978,3345.94 ; v1(3988,3381) 3988,3355.94 3978,3345.94 ; 3968,3335.94 3978,3345.94 ; 3968,3335.94 3969.94,3335.94 3978,3344 3978,3345.94
LCD_B5: J2.37 J3.26 U1.174 | length 4683.8
  Top Layer w10: U1.174@3570.69,3905.33 v1(3570.69,4055.63) ; v1(3719,1987.48) 3742.52,1963.96 J3.26@3742.52,1925
  Layer 1 w10: v1(3570.69,4055.63) 3488.13,4055.63 3477,4044.5 3477,3745.44 3778.5,3443.94 3778.5,3408 3788,3398.5 3829,3398.5 3867,3436.5 4027.5,3436.5 4091.5,3372.5 v1(4091.5,3305)
  Layer 3 w10: v1(3570.69,4055.63) 3483.63,4055.63 3227.25,3799.25 3216,3799.25 2947.5,3530.75 2947.5,2372.5 3115.72,2204.28 3115.72,2183.63 3376.46,1922.89 3654.41,1922.89 v1(3719,1987.48)
  Bottom Layer w10: J2.37@3925.04,3304.45 3997.5,3304.45 4012.95,3289 4075.5,3289 v1(4091.5,3305)
LCD_B6: J2.38 J3.27 U1.175 | length 4919.2
  Top Layer w10: U1.175@3551,3905.33 3551,3870 3542.86,3861.85 3481,3861.85 3446.85,3896 3397.59,3896 3391,3902.59 3238.59,3902.59 3182,3846 v1(3182,3623) 3103,3544 3103,2361 3120,2344 3120,1753 3244,1629 3524.83,1629 3722.83,1827 J3.27@3722.83,1925
  Layer 2 w10: 4250,2730 4250,2686.71 4319,2617.71
  Layer 4 w10: v1(3182,3623) 3292,3623 3584.5,3330.5 3746.5,3330.5 3781.5,3295.5 4038,3295.5 4099,3356.5 v1(4115,3356.5)
  Bottom Layer w10: J2.38@3925.04,3272.95 4107.95,3272.95 4115,3280 v1(4115,3356.5)
LCD_B7: J2.39 J3.28 U1.176 | length 4256.3
  Top Layer w10: v1(3477,1835) 3485.5,1826.5 3656.53,1826.5 3703.15,1873.12 J3.28@3703.15,1925 ; v1(3515,4032) 3531.32,4015.68 U1.176@3531.32,3905.33
  Layer 1 w10: v1(3515,4032) 3659,3888 3659,3700 3671.5,3687.5 3671.5,3649.38 3682.77,3638.11 3682.77,3616 3784.32,3514.45 v1(3822.43,3514.45)
  Layer 4 w10: v1(3477,1835) 3191,2121 3191,2261 3233,2303 3233,2493.93 2850,2876.93 2850,3198 2908,3256 2908,3511.44 3299.15,3902.59 3385.59,3902.59 v1(3515,4032)
  Bottom Layer w10: v1(3822.43,3514.45) 3822.43,3496.63 3855.53,3463.53 3855.53,3438.69 3864,3430.21 3864,3365.98 3876.5,3353.48 3876.5,3252.96 3888,3241.46 J2.39@3925.04,3241.46
LCD_BL: J1.23 J3.34 U1.163 | length 3827.4
  Top Layer w10: v1(3585,1968) v1(3585,1968) J3.34@3585.04,1925
  Layer 3 w10: v1(3282,3263) 3301,3282 3429,3282 3479,3332 3531,3332 3591,3272 4208,3272 4248,3232 4248,3209 v1(4303,3154)
  Layer 4 w10: v1(3282,3263) 3200,3263 3185,3248 3185,3150 3173,3138 3173,2770 3558,2385 3558,2017 3585,1990 v1(3585,1968)
  Bottom Layer w10: v1(4303,3154) 4272,3185 4199,3185 4168,3216 4168,3411 4311,3554 4346.07,3554 4594.07,3306 4656,3306 4664,3298 4664,3296 4685.47,3274.53 J1.23@4724.96,3274.53
LCD_CLK: J3.30 U1.111
LCD_DE: J3.33 U1.28 | length 1501.3
  Top Layer w10: v1(3281,2918) 3262,2899 3254,2899 3203,2848 3203,2523.06 3369,2357.06 3369,2285.5 3494.81,2159.69 3536,2159.69 3557,2138.69 3557,2048 3614.72,1990.28 3614.72,1962 3604.72,1952 J3.33@3604.72,1925 ; U1.28@3450,3292.52 3488.48,3292.52 3501,3280 v1(3501,3274)
  Layer 2 w10: v1(3281,2918) 3338.44,2975.44 3338.44,3029.15 3373.21,3063.93 ; 3501,3247.79 v1(3501,3274)
LCD_G2: J2.30 J3.14 U1.128 | length 3921.1
  Top Layer w10: v1(3446,2363) 3484,2325 3634.5,2325 3640,2319.5 3834.5,2319.5 3952,2202 3952,2046 3978.74,2019.26 J3.14@3978.74,1925 ; v1(4312,3786) 4358,3786 4379.89,3764.11 4379.89,3757.39 4392,3745.28 U1.128@4459.09,3745.28
  Layer 2 w10: v1(3446,2363) 3366,2363 3297,2432 3297,2753 3290.5,2759.5 3290.5,2872.5 3257.5,2905.5 3257.5,2980.43 3357,3079.93 3357,3127.08 3474,3244.08 3474,3325.9 3670.1,3522 v1(3740,3522) 3687,3575 ; 3687,4139.52 3712.5,4165.02 3712.5,4223 3845,4223 v1(3945,4323)
  Layer 3 w10: v1(3945,4323) 4194,4323 4386,4131 4386,3974.68 4358.5,3947.18 4358.5,3832.5 v1(4312,3786)
  Bottom Layer w10: J2.30@3740,3493.43 v1(3740,3522)
LCD_G3: J2.29 J3.15 U1.129 | length 4374.8
  Top Layer w10: v1(3716,1765) 3762,1719 3762,1696 3808,1650 3913.06,1650 3959.06,1696 J3.15@3959.06,1925 ; v1(4405,3769) 4409.04,3764.96 U1.129@4459.09,3764.96
  Layer 2 w10: 3415,1765 3165,2015 3165,3058.5 3305.5,3199 3305.5,3248 3328,3270.5 3424,3270.5 3433.5,3280 3433.5,3353 3447,3366.5 3447,3605.74 3484.5,3643.24 3499.74,3643.24 3550.5,3694 v1(3615,3694)
  Bottom Layer w10: v1(3615,3694) 3615,3716 3624,3725 3627,3725 3642,3710 ; J2.29@3740,3461.93 3714.54,3461.93 3684,3492.47 3684,3647 ; v1(4405,3769) 4405,3775.23 4422.27,3792.5 4422.27,3825.73 4392,3856 4392,3872 4385.5,3878.5 4218.5,3878.5 4180,3840 4180,3800 4169,3789 3664,3789 3642,3767 3642,3710 ; 3642,3710 3642,3689 3684,3647 ; 3642,3710 3671.5,3680.5 3671.5,3674 3684,3661.5 3684,3647
LCD_G4: J2.28 J3.16 U1.130 | length 5128.9
  Top Layer w10: J3.16@3939.37,1925 3939.37,1959.37 3945,1965 v1(3945,2012) ; U1.130@4459.09,3784.65 4512,3784.65 4535,3807.65 v1(4535,3909)
  Layer 1 w10: v1(3691,3444) 3691,3502 3461,3732 3461,4083 3545,4167 3635,4167 3681,4121 4168,4121 4219,4070 4374,4070 v1(4535,3909)
  Layer 3 w10: v1(3691,3444) 3684.84,3450.16 3662,3450.16 3656.34,3455.82 3004.82,3455.82 2979.5,3430.5 2979.5,3351.5 3001,3330 3001,2445.36 3296,2150.36 3329.05,2150.36 3472,2007.41 3671.91,2007.41 3676.5,2012 v1(3945,2012)
  Bottom Layer w10: v1(3691,3444) 3704.57,3430.43 J2.28@3740,3430.43
LCD_G5: J2.34 J3.17 U1.131 | length 3857.6
  Top Layer w10: v1(3781,2289) 3839,2289 3924,2204 3924,2045.31 3919.69,2041 J3.17@3919.69,1925 ; v1(4445,3849) 4494,3849 4503,3840 4503,3804.33 U1.131@4459.09,3804.33
  Layer 2 w10: 3589,3005 3606,2988 ; v1(3994.01,3638.01) 4222.5,3866.5 4368,3866.5 4392,3842.5 4438.5,3842.5 v1(4445,3849)
  Layer 4 w10: v1(3781,2289) 3357.78,2712.22 3357.78,2922.22 3308,2972 3308,3264 3330.5,3286.5 3417.5,3286.5 3478.5,3347.5 3527,3347.5 3560,3314.5 3721,3314.5 3756.5,3279 4116,3279 4139,3302 4139,3408 4130.72,3416.28 4105.72,3416.28 4085.16,3436.84 4069.16,3436.84 v1(4019,3487)
  Bottom Layer w10: J2.34@3925.04,3398.94 3960.94,3398.94 4014.69,3452.69 ; v1(3994.01,3638.01) 4014.69,3617.33 4014.69,3452.69 ; v1(4019,3487) 4019,3457 4014.69,3452.69
LCD_G6: J2.33 J3.18 U1.132 | length 5618.5
  Top Layer w10: J3.18@3900,1925 v1(3900,2080) ; v1(4416,3866) v1@4421,3861 ; v1(4421,3873) v1@4421,3861 ; U1.132@4459.09,3824.02 4421,3824.02 v1@4421,3861
  Layer 2 w10: v1(3976,3599) 3976,3608.01 3962.01,3622 3962.01,3656.01 3976,3670 3993,3670 3997,3674 4003,3674 4234,3905 4377,3905 v1(4416,3866)
  Layer 3 w10: v1(3900,2080) 4016,2080 4051,2045 4859,2045 5086,2272 5346,2272 5654,2580 5654,3852 5652,3854 4479,3854 4460,3873 v1(4421,3873)
  Bottom Layer w10: J2.33@3925.04,3430.43 3965.43,3430.43 3995.5,3460.5 3995.5,3579.5 v1(3976,3599)
LCD_G7: J2.32 J3.19 U1.133 | length 3871.4
  Top Layer w10: v1(3725,2280) 3725,2076 3756,2045 3840,2045 3880.32,2004.68 J3.19@3880.32,1925 ; v1(4361.78,4010) 4361.78,3994 4377.78,3978 U1.133@4377.78,3905.33
  Layer 2 w10: 3711,3414.5 3744,3381.5 ; v1(3725,2280) 3725,2349.78 3523.78,2551 3523.78,2753.59 3502.87,2774.5 3502.87,2821.5 3523.78,2842.41 3523.78,3054.78 3552.5,3083.5 3607.5,3083.5 3664.5,3140.5 3664.5,3192.46 3741.54,3269.5 3840.2,3269.5 3875.18,3304.49 3875.18,3325.06 3882.02,3331.89 3882.02,3442.02 v1(3968,3528) 4046,3606 4233.77,3606 4277.27,3649.5 4316.5,3649.5 4412.03,3745.03 4428.97,3745.03 4480,3796.06 4480,3891.78 4377.78,3994 v1(4361.78,4010) 4309.78,4062 ; 3826,3381.5 3836.5,3392 3836.5,3416 ; 3826,3757 4131,4062 ; 4026,2564 4085,2505
  Bottom Layer w10: J2.32@3925.04,3461.93 3960,3461.93 3973.75,3475.68 3973.75,3522.25 v1(3968,3528)
LCD_HSYNC: J3.31 U1.12 | length 2405
  Top Layer w10: U1.12@3450,3607.48 3340.48,3607.48 3257,3524 3159.5,3524 3158,3522.5 3158,3230 3194,3194 3194,2991 3165,2962 3165,2379 3171,2373 3171,2150 3452,1869 3510.62,1869 3537.12,1842.5 3632,1842.5 3644.09,1854.59 J3.31@3644.09,1925
LCD_R3: J2.10 J3.6 U1.86 | length 1818.4
  Top Layer w10: J3.6@4136.22,1925 4136.22,2007 4184.5,2055.28 4184.5,2379.5 v1(4255,2450) ; v1(4204.5,2783) 4210,2777.5 4320,2777.5 4338.41,2795.91 U1.86@4338.41,2896.24
  Layer 1 w10: v1(3792,2830) 3847.5,2774.5 4052.16,2774.5 4255,2571.66 ; v1(4204.5,2783) 4204.5,2680.85 4255,2630.35 4255,2571.66 ; v1(4255,2450) 4255,2571.66
  Bottom Layer w10: J2.10@3740,2863.5 3776,2863.5 3792,2847.5 v1(3792,2830)
LCD_R4: J2.11 J3.7 U1.87 | length 2628.6
  Top Layer w10: J3.7@4116.54,1925 4116.54,1890 4131,1875.54 4131,1664 4158,1637 4224,1637 4265,1678 4265,1829.84 4267.45,1832.29 4267.45,1893.45 4295,1921 4295,2317 4399,2421 4399,2528 4367,2560 4351,2560 v1(4335,2576) ; U1.87@4358.09,2896.24 4358.09,2857.91 v1(4371,2845)
  Layer 4 w10: v1(3832,2962) 3941,2853 4017.31,2853 4066,2804.31 4066,2674 4164,2576 v1(4335,2576)
  Bottom Layer w10: J2.11@3740,2895 3783,2895 3832,2944 v1(3832,2962) ; v1(4335,2576) 4371,2612 v1(4371,2845)
LCD_R5: J2.12 J3.8 U1.88 | length 3339.5
  Top Layer w10: J3.8@4096.85,1925 4096.85,1996.41 ; v1(4140.5,2463) 4106.5,2429 4106.5,2184.5 4123,2168 ; v1(4141,2463) 4112,2434 4112,2196 4123,2185 4123,2168 ; v1(4158.88,2808) 4166.5,2808 4166.5,2769.49 4176.49,2759.5 4332.5,2759.5 4394.5,2821.5 4394.5,2858.26 4384,2868.76 4377.78,2868.76 U1.88@4377.78,2896.24 ; 4096.85,1996.41 4096.85,2020 4123,2046.15 4123,2168 ; 4096.85,1996.41 4138.83,2038.39 4138.83,2152.17 4123,2168
  Layer 2 w10: 4093,2808 4140,2761 ; v1@4140,2459 4140,2761 ; 4140.5,2447 v1(4140.5,2463) 4140.5,2760.5 ; v1(4158.88,2808) 4140.5,2789.62 4140.5,2760.5 ; 4140,2761 4140.5,2760.5
  Bottom Layer w10: J2.12@3740,2926.5 3780.5,2926.5 3790,2936 3790,2973 3808,2991 3840,2991 3856,2975 3856,2890 3827,2861 3827,2744 3848.57,2722.43 3848.57,2601.25 3810.32,2563 3775,2563 3764,2552 3764,2491 3808,2447 3809.25,2448.25 3911.5,2448.25 3928.75,2465.5 4138.5,2465.5 v1(4141,2463)
LCD_R6: J2.24 J3.9 U1.89 | length 2960.8
  Top Layer w10: J3.9@4077.17,1925 4077.17,2051 v1(4096.17,2070) ; v1(4408,2990) 4415,2990 4415,2981 4455.65,2981 U1.89@4459.09,2977.56
  Layer 4 w10: v1(4096.17,2070) 4099,2070 3409,2760 3409,2977 3488,3056 3488,3120 3558.5,3190.5 3558.5,3225 3568,3234.5 3631.5,3234.5 v1(3644,3222) 3644,3221 3660.5,3204.5 3691,3204.5 3711.5,3184 3711.5,3127.5 3750.5,3088.5 3858,3088.5 4016,2930.5 4040,2930.5 4051.5,2942 4051.5,2949.5 4073.48,2971.48 4073.48,2998.48 4099,3024 4146,3024 4153,3017 4253.5,3017 4283,2987.5 4317.5,2987.5 4325.69,2995.69 4402.31,2995.69 v1(4408,2990)
  Bottom Layer w10: v1(3644,3222) 3673,3251 3673,3281.45 3696,3304.45 J2.24@3740,3304.45
LCD_R7: J2.15 J3.10 U1.110 | length 2354.8
  Top Layer w10: v1(3681,2351) 3835,2351 3968,2218 3968,2062 4057.48,1972.52 J3.10@4057.48,1925 ; v1(4335,3201) 4330,3206 4330,3298 4352,3320 4370.54,3320 4384.54,3334 4384.54,3377.49 4398,3390.95 U1.110@4459.09,3390.95
  Layer 2 w10: 3657,2897 3657,2657.5 3651.5,2652 3651.5,2575 3664,2562.5 3858.5,2562.5 3893,2528 3893,2367 3775,2249 3695,2249 3681,2263 v1(3681,2351) ; 3789,3003 v1(3789,3029) ; 3879,3040 3879,3086.52 3994.48,3202 ; v1@4334,3202 v1(4335,3201)
  Bottom Layer w10: J2.15@3740,3020.98 3780.98,3020.98 v1(3789,3029)
LCD_VSYNC: J3.32 U1.11 | length 2693.2
  Top Layer w10: v1(3414,1947) 3450,1911 3450,1896 3460.76,1885.24 3553.12,1885.24 3579.86,1858.5 3616,1858.5 3624.41,1866.91 J3.32@3624.41,1925 ; U1.11@3450,3627.17 3500.83,3627.17 v1(3508,3620)
  Layer 3 w10: v1(3414,1947) 2963.5,2397.5 2963.5,3447.5 3024,3508 3416,3508 3508,3600 v1(3508,3620)
LED0: DS0.2 J1.57 U1.57 | length 2135.3
  Top Layer w10: U1.57@3767.54,2896.24 3767.54,2715.96 3788.87,2694.63 3788.87,2682 3925,2545.87 v1(3925,2509) ; DS0.2@4326.93,2050 4356,2079.07 v1(4356,2253)
  Layer 1 w10: v1(3925,2509) 3931.5,2502.5 4160.14,2502.5 4215.5,2447.14 4215.5,2393.5 v1(4356,2253)
  Layer 3 w10: v1(4356,2253) 4356,2254.8 4397.2,2296 4397.2,2372.7 4459,2434.5 4486.27,2434.5 4568.27,2516.5 4864,2516.5 4889.5,2542 4889.5,2615.5 v1(4849,2656)
  Bottom Layer w10: v1(4849,2656) 4869.1,2676.1 J1.57@4910,2676.1
LED1: J1.56 U1.56 | length 1955.4
  Top Layer w10: U1.56@3747.85,2896.24 3747.85,3040 3799.35,3091.5 3893.5,3091.5 3897,3088 3990,3088 4173.5,3271.5 4235,3271.5 4294.51,3331.01 4294.51,3369.51 v1(4302,3377)
  Layer 1 w10: v1(4302,3377) 4361.8,3317.2 4396.8,3317.2 4769.25,2944.75 4824,2944.75 4835.5,2956.25 v1(4835.5,2991.75)
  Bottom Layer w10: v1(4835.5,2991.75) 4835.5,2945.75 4834.5,2944.75 4834.5,2778.5 4857,2756 4857,2720 4869.4,2707.6 J1.56@4910,2707.6